# Allegro board led_youtube.brd
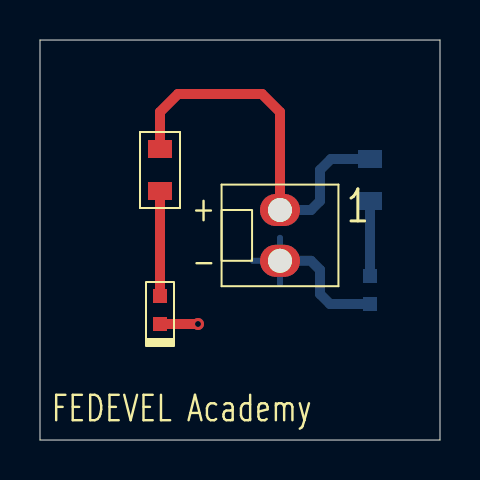
[diagram p0: board, top side]
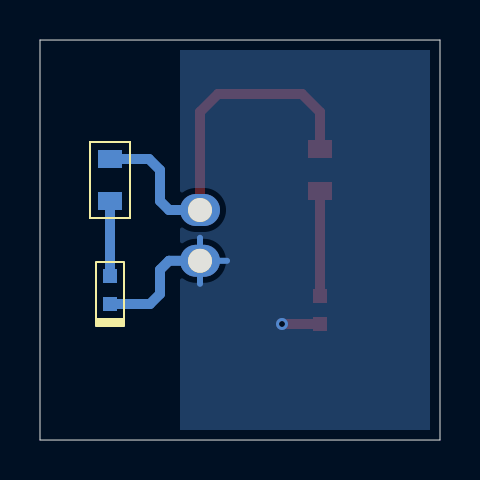
[diagram p1: board, bottom side, seen from below]

Outline 20 x 20 mm; copper layers: TOP, BOTTOM. Coordinates in mm from the lower left corner of the outline.
Outline path: 0,20 20,20 20,0 0,0 0,20

## Design rules (mm)
constraint set DEFAULT: min track width 0.3

## Placement (name value [footprint] x y rotation side)
D1  Green  [LED0603G]  6 6.5 90 top
D2  Green  [LED0603G]  16.5 7.5 90 bottom
J1  1x2 Header  [HDR1X2]  12 11.5 0 top
R1  360R 1%  [R0805]  6 13.5 270 top
R2  360R 1%  [R0805]  16.5 13 270 bottom

## Library data of the parts
D1 D2 = LED SM 0603 3V GREEN
J1 = CONN HEADER VERT 2POS 2.54MM
R1 R2 = RES SMD 360 OHM 1% 1/8W 0805

## Footprints (pads in the part's own frame, mm; a bottom-side part is the same pattern mirrored in y, then rotated)
HDR1X2
  oval 2x1.6 hole 1.2: 1(0,0) 2(0,-2.54)
LED0603G
  rect 0.7x0.7 smd: 1(-0.7,0) 2(0.7,0)
R0805
  rect 0.9x1.2 smd: 1(-1.05,0) 2(1.05,0)

## Nets
+3V3: J1.1 R1.1 R2.1
GND: D1.1(C) D2.1(C) J1.2(-)
DIODE1: D1.2 R1.2
DIODE2: D2.2 R2.2

## Via types
v1: diameter 0.6, hole 0.3, TOP to BOTTOM, 1 via

## Routing (per net, layer and track width the routed paths; a pad name or vN(x,y) marks a point on that pad's centre or on a via; arc(x,y) is an arc through that point)
+3V3: length 20
  TOP w0.5: R1.1 6,16.4 6.9,17.3 11.1,17.3 12,16.4 J1.1
  BOTTOM w0.5: R2.1 14.55,14.05 14,13.5 14,11.95 13.55,11.5 J1.1
GND: length 11.7
  TOP w0.5: D1.1 v1(7.9,5.8)
  BOTTOM w0.3: J1.2 12,10.11 ; J1.2 10.65,8.96 ; J1.2 12,7.81
  BOTTOM w0.5: J1.2 13.55,8.96 14,8.51 14,7.3 14.5,6.8 D2.1
DIODE1: length 5.2
  TOP w0.5: R1.2 D1.2
DIODE2: length 3.8
  BOTTOM w0.5: R2.2 D2.2

## Copper pours and planes (outline as drawn; the poured copper is in the pictures)
GND on BOTTOM: 0.5,0.5 0.5,19.5 13,19.5 13,0.5

## Text on the board
Ref Des/Silkscreen Top: FEDEVEL Academy | + | -
